# Altium PCB 雾霾检测器PCB.PcbDoc
Units mm, origin at the board's own origin, x right, y up, seen from the top; angles counter-clockwise.
Board outline 99.95 x 68.33 mm, 2 copper layers (Top Layer, Bottom Layer); 13 components, 23 nets, 115 pads, 23 vias.
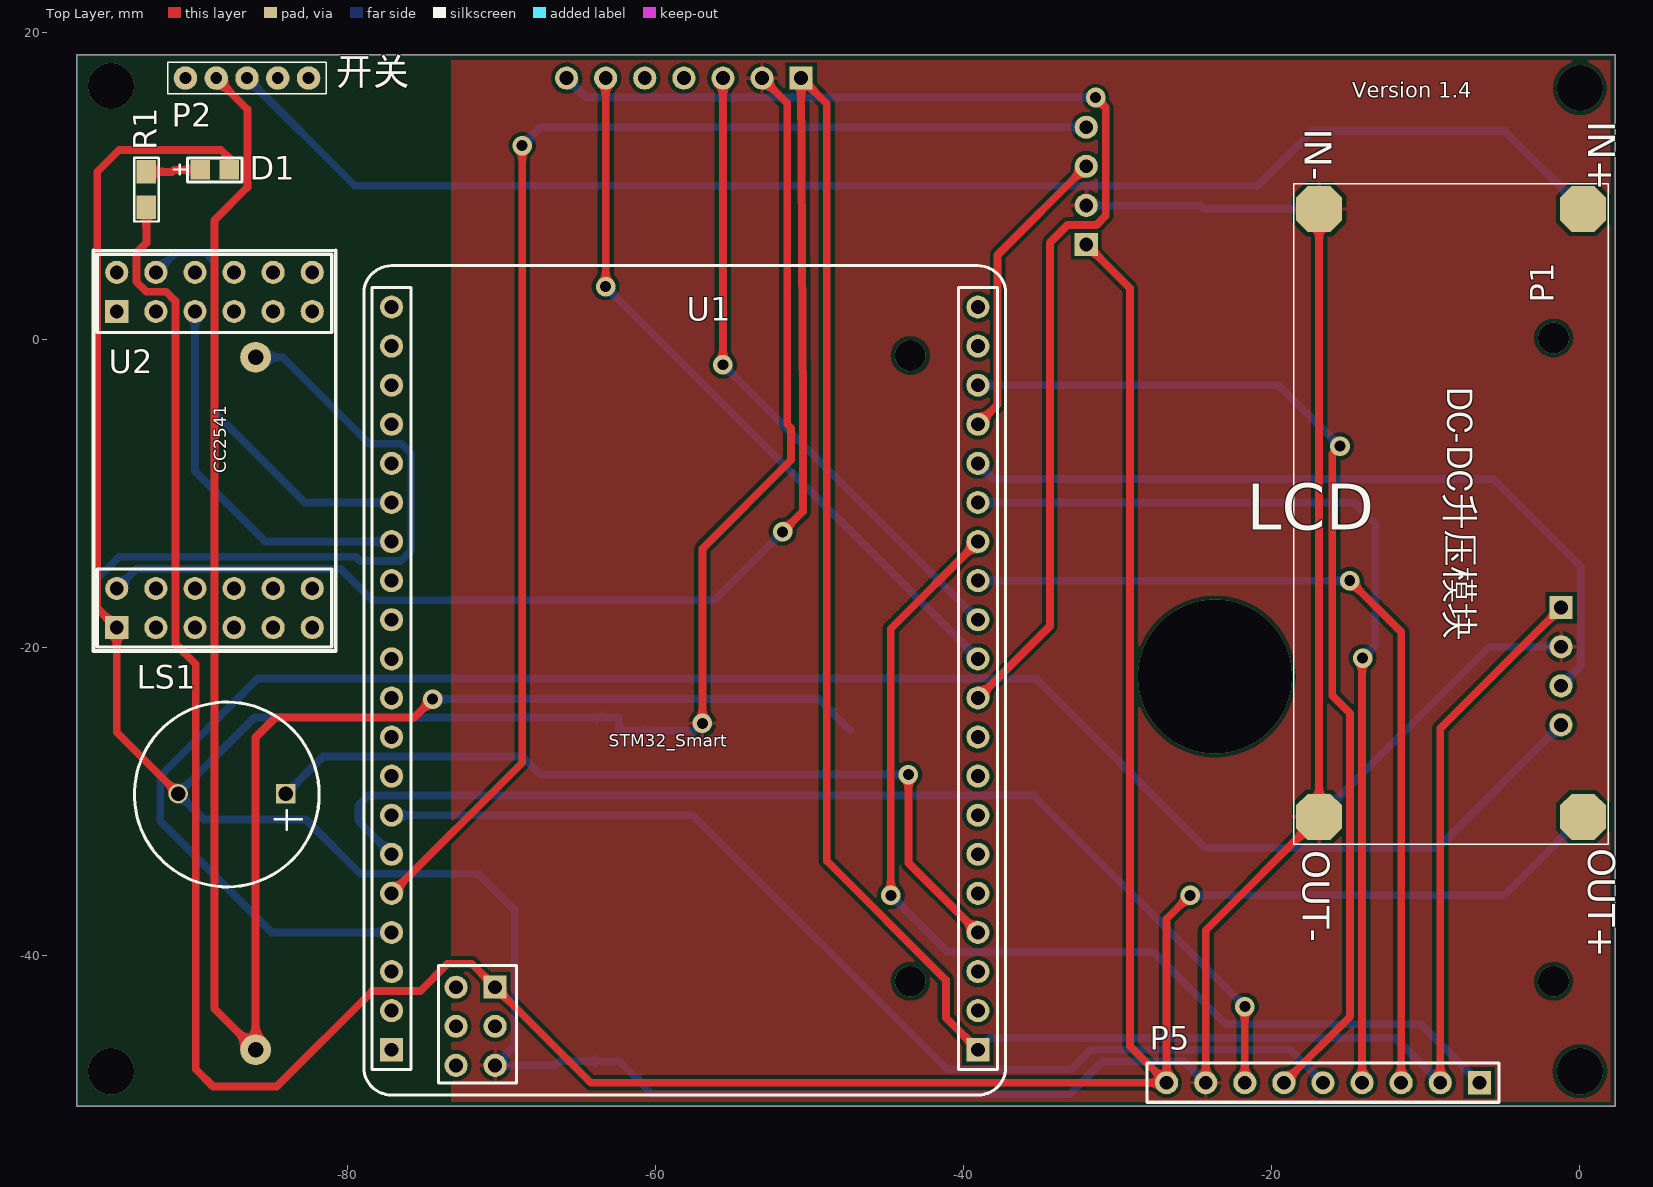
[diagram p0: Top Layer view]
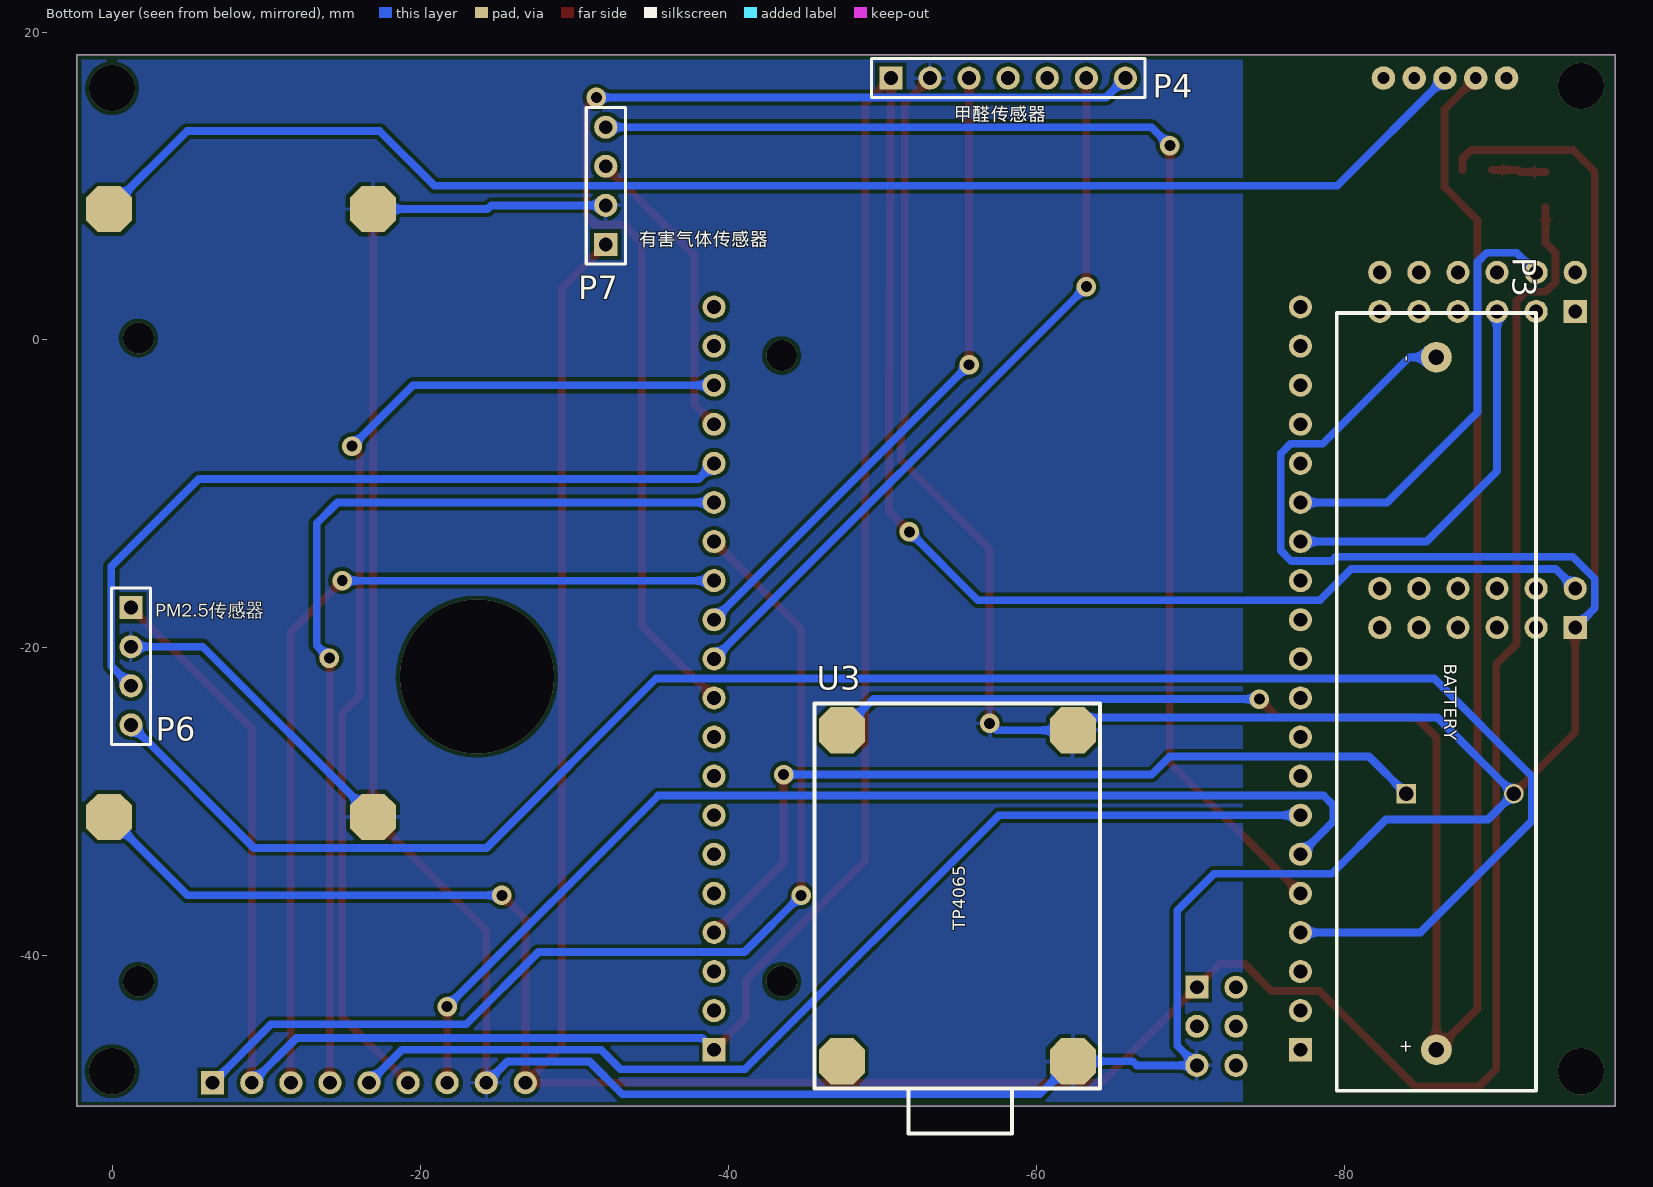
[diagram p1: Bottom Layer view, seen from below]

## Layer stack, top to bottom
Top Solder: solder mask 0.0102, Solder Resist, Dk 3.5
Top Layer: signal copper 0.0356
Dielectric 1: dielectric 0.32, FR-4, Dk 4.8
Bottom Layer: signal copper 0.0356
Bottom Solder: solder mask 0.0102, Solder Resist, Dk 3.5

## Board outline
-97.605,18.525 2.344,18.525 2.344,-49.801 -97.605,-49.801

## Design rules (kind name [scope] priority, off if disabled: settings)
Clearance [All] p1: gap=0.254
PolygonConnect [All] p1: connectstyle=Relief reliefconductorwidth=0.254 reliefentries=4 polygonreliefangle="90 Angle" airgapwidth=0.254
RoutingVias [All] p1: holewidth=0.711 width=1.27 viastyle="Through Hole" minholewidth=0.711 minwidth=1.27 maxholewidth=0.711 maxwidth=1.27
SolderMaskExpansion [All] p1: expansion=0.102
Width [All] p1: maxlimit=1.27 minlimit=0.254 preferedwidth=0.508 minimp=50.000000 maximp=50.000000 favimp=50.000000
30 further rules are at their usual default settings.

## Components (designator, comment, footprint, x,y, rotation, side; value= is the part's Value field where it differs from the comment)
D1 "LED0" 0805-led -88.646,11.049 r0 top
LS1 "Bell" BUZZER-12MM -87.774,-29.481 r180 top
P1 "升压模块" DC-DC升压模块 0.254,8.509 r270 top
P2 "电源开关" 拨动开关（2mm） -90.551,17.018 r0 top
P3 "电池座" 7号电池盒-4.5CM -85.996,-45.229 r90 bottom
P4 "DS-HCHO" HDR1X7 -50.546,17.018 r180 bottom
P5 "LCD" HDR1X9 -6.477,-48.26 r180 top
P6 "雾霾传感器接口" HDR1X4 -1.168,-17.39 r270 bottom
P7 "MQ5" HDR1X4 -32.021,6.206 r90 bottom
R1 "1K" 0805-SMALL -93.091,10.922 r270 top
U1 "STM32" STM32_Smart -77.158,-46.118 r270 top
U2 "CC2541" Smart_RF_2541 -95.013,-18.686 r90 top
U3 "TP4065" TP4065_模块 -47.371,-46.863 r90 bottom

## Footprints (in the part's own frame and the unit in brackets; to place one, negate y for a bottom-side part, rotate by r counter-clockwise, add the part's x,y. Pads: shape width x height; smd on the part's side, far side on the other; paste and mask are expansions set on the pad)
7号电池盒-4.5CM [mm]
  round 2 hole 1: 1(-0.889,0) 2(44.111,0)
  silkscreen extent -3.56,-6.48 46.99,6.48
0805-led [mil]
  rect 50x50 smd: 1(-37.5,0) 2(37.5,0)
  silkscreen extent -105,-31 69,31
0805-SMALL [mil]
  rect 60x50 smd: 1(0,0) 2(90,0)
  silkscreen extent -36,-31 127,32
BUZZER-12MM [mm]
  rect 1.27x1.27 hole 0.95: 1(-3.75,0)
  round 1.27 hole 0.95: 2(3.25,0)
  silkscreen extent -5.91,-5.95 6.09,6.05
DC-DC升压模块 [mm]
  oct 3x3 all layers, no hole: 1(0,0) 2(0,-17.145) 3(39.497,0) 4(39.497,-17.145)
  silkscreen extent -1.65,-18.8 41.27,1.65
HDR1X4 [mm] "Connector; Header; 4 Position"
  rect 1.5x1.5 hole 0.9: 1(0,0)
  round 1.5 hole 0.9: 2(2.54,0) 3(5.08,0) 4(7.62,0)
  silkscreen extent -1.27,-1.27 8.89,1.27
HDR1X7 [mm] "Connector; Header; 7 Position"
  rect 1.5x1.5 hole 0.9: 1(0,0)
  round 1.5 hole 0.9: 2(2.54,0) 3(5.08,0) 4(7.62,0) 5(10.16,0) 6(12.7,0) 7(15.24,0)
  silkscreen extent -1.27,-1.27 16.51,1.27
HDR1X9 [mm] "Connector; Header; 9 Position"
  rect 1.5x1.5 hole 0.9: 1(0,0)
  round 1.5 hole 0.9: 2(2.54,0) 3(5.08,0) 4(7.62,0) 5(10.16,0) 6(12.7,0) 7(15.24,0) 8(17.78,0) 9(20.32,0)
  silkscreen extent -1.27,-1.27 21.59,1.27
Smart_RF_2541 [mm]
  rect 1.5x1.5 hole 0.9: 1(0,0) 13(20.54,0)
  round 1.5 hole 0.9: 2(0,-2.54) 3(0,-5.08) 4(0,-7.62) 5(0,-10.16) 6(0,-12.7) 7(2.54,-12.7) 8(2.54,-10.16) 9(2.54,-7.62) 10(2.54,-5.08) 11(2.54,-2.54) 12(2.54,0) 14(20.54,-2.54) 15(20.54,-5.08) 16(20.54,-7.62) 17(20.54,-10.16) 18(20.54,-12.7) 19(23.08,-12.7) 20(23.08,-10.16) 21(23.08,-7.62) 22(23.08,-5.08) 23(23.08,-2.54) 24(23.08,0)
  silkscreen extent -1.52,-14.22 24.51,1.52
STM32_Smart [mm]
  rect 1.5x1.5 hole 0.9: 1(0,38.1) 40(0,0) 46(-4.064,6.731)
  round 1.5 hole 0.9: 2(-2.54,38.1) 3(-5.08,38.1) 4(-7.62,38.1) 5(-10.16,38.1) 6(-12.7,38.1) 7(-15.24,38.1) 8(-17.78,38.1) 9(-20.32,38.1) 10(-22.86,38.1) 11(-25.4,38.1) 12(-27.94,38.1) 13(-30.48,38.1) 14(-33.02,38.1) 15(-35.56,38.1) 16(-38.1,38.1) 17(-40.64,38.1) 18(-43.18,38.1) 19(-45.72,38.1) 20(-48.26,38.1) 21(-48.26,0) 22(-45.72,0) 23(-43.18,0) 24(-40.64,0) 25(-38.1,0) 26(-35.56,0) 27(-33.02,0) 28(-30.48,0) 29(-27.94,0) 30(-25.4,0) 31(-22.86,0) 32(-20.32,0) 33(-17.78,0) 34(-15.24,0) 35(-12.7,0) 36(-10.16,0) 37(-7.62,0) 38(-5.08,0) 39(-2.54,0) 41(-4.064,4.191) 42(-1.524,4.191) 43(1.016,4.191) 44(1.016,6.731) 45(-1.524,6.731)
  silkscreen extent -50.95,-1.8 2.94,39.9
TP4065_模块 [mm]
  oct 3x3 / inner oct 3x3 / far side oct 0x0 all layers, no hole: 1(0,0) 2(0,-15) 3(21.5,-15) 4(21.5,0)
  silkscreen extent -4.7,-16.76 23.24,1.78
拨动开关（2mm） [mil]
  round 60 hole 30: 0(0,0) 0(314.96,0) 1(78.74,0) 2(157.48,0) 3(236.22,0)
  silkscreen extent -45,-40 360,40

## Part data
D1: "Typical INFRARED GaAs LED"
LS1: "Electrical Bell"
P1 P6 P7: library part "Header 4", "Header, 4-Pin"
P2: library part "Header 3", "Header, 3-Pin"
P3: library part "Header 2", "Header, 2-Pin"
P4: library part "Header 7", "Header, 7-Pin"
P5: library part "Header 9", "Header, 9-Pin"
R1: library part RES2
U1: library part STM32_Smart
U2: library part Smart_RF_2541
U3: library part "TP4056_ 模块"

## Via types
v1: diameter 1.27, hole 0.711, Top Layer to Bottom Layer, 14 vias
v2: diameter 2, hole 2, Top Layer to Bottom Layer, 4 vias
v3: diameter 3, hole 3, Top Layer to Bottom Layer, 4 vias
v4: diameter 10, hole 10, Top Layer to Bottom Layer, 1 vias

## Nets (pads, with @x,y where several pads share a name; then routed paths per layer and width w, separated by ;. In a path a pad name is that pad's centre, name@x,y a point inside that pad or via, vN(x,y) a via of type N, cw(c..) or ccw(c..) an arc to the next point about the centre after c; other vN are vias at no path point)
ADC1: P6.3 U1.16 | length 50.2
  Bottom Layer w0.508: U1.16 -38.043,-9.033 -5.576,-9.033 0.114,-14.723 0.114,-21.188 P6.3
ADC2: P7.3 U1.17 | length 19.7
  Top Layer w0.508: U1.17 -37.783,-4.203 -37.783,5.524 P7.3
CS: P5.7 U1.35 | length 72.6
  Top Layer w0.508: P5.7 v1(-21.717,-43.311)
  Bottom Layer w0.508: U1.35 -79.312,-31.264 -79.312,-30.242 -78.677,-29.607 -35.421,-29.607 v1(-21.717,-43.311)
D/C: P5.5 U1.34 | length 68.8
  Bottom Layer w0.508: U1.34 -57.569,-30.878 -41.06,-47.387 -32.984,-47.387 -31.714,-46.117 -18.78,-46.117 P5.5
DS-RX: P4.7 U1.10 | length 78.7
  Top Layer w0.508: U1.10 -34.38,-18.58 -34.38,6.334 -33.237,7.477 -31.357,7.477 -30.747,8.087 -30.747,15.097 v1(-31.408,15.757)
  Bottom Layer w0.508: P4.7 -64.525,15.757 v1(-31.408,15.757)
DS-TX: P4.6 U1.11 | length 47.8
  Top Layer w0.508: v1(-63.246,3.47) P4.6
  Bottom Layer w0.508: v1(-63.246,3.47) U1.11
GND: D1.2 LS1.2 P1.2 P1.4 P3.2 P4.2 P5.8 P6.2 P7.2 U1.44 U2.1 U3.2 U3.3 | length 358.7
  Top Layer w0.508: LS1.2 -95.013,-25.492 U2.1 -96.279,-17.42 -96.279,10.931 -94.857,12.354 -88.253,12.354 -87.694,11.794 D1.2 ; v1(-56.96,-24.908) -56.96,-13.554 -51.194,-7.788 -51.194,-5.731 -51.448,-5.477 -51.448,15.38 P4.2 ; P5.8 -24.257,-38.354 P1.4 P1.2
  Bottom Layer w0.508: U2.1 -96.279,-17.42 -96.279,-15.51 -94.857,-14.088 -79.465,-14.088 -79.185,-14.367 -76.569,-14.367 -75.883,-13.681 -75.883,-7.382 -76.518,-6.747 -78.601,-6.747 -84.23,-1.118 P3.2 ; v1(-56.96,-24.908) -57.415,-25.363 U3.3 -62.371,-24.527 -86.07,-24.527 LS1.2 -89.349,-31.156 -82.716,-31.156 -79.185,-34.687 -71.54,-34.687 -69.152,-37.075 -69.152,-45.859 U1.44 -66.536,-47.134 -66.265,-46.863 U3.2 -60.221,-49.013 -33.098,-49.013 -30.964,-46.879 -25.638,-46.879 P5.8 ; P7.2 -24.575,8.746 -24.338,8.509 P1.2 ; P1.4 -5.833,-19.93 P6.2
MISO: P5.1 U1.14 | length 68.6
  Top Layer w0.508: v1(-44.717,-36.084) -44.717,-18.757 U1.14
  Bottom Layer w0.508: v1(-44.717,-36.084) -41.034,-39.767 -27.649,-39.767 -22.95,-44.466 -10.271,-44.466 P5.1
MOSI: P5.4 U1.15 | length 63.1
  Top Layer w0.508: P5.4 -14.097,-20.704 v1(-14.06,-20.666)
  Bottom Layer w0.508: U1.15 -14.593,-10.558 -13.247,-11.904 -13.247,-19.853 v1(-14.06,-20.666)
NetD1_1: D1.1 R1.1 | length 3.5
  Top Layer w0.508: R1.1 -91.428,10.922 -91.301,11.049 D1.1
PB5: U1.33
PB8: P7.4 U1.36 | length 89.2
  Top Layer w0.508: U1.36 -68.67,-27.47 v1(-68.67,12.633)
  Bottom Layer w0.508: v1(-68.67,12.633) -67.477,13.826 P7.4
PB9: P6.4 U1.37 | length 122.5
  Bottom Layer w0.508: U1.37 -84.95,-38.498 -92.19,-31.258 -92.19,-28.337 -85.84,-21.987 -35.294,-21.987 -24.27,-33.011 -9.169,-33.011 P6.4
PC13: LS1.1 U1.4 | length 54.1
  Top Layer w0.508: v1(-43.574,-28.235) -43.574,-33.982 U1.4
  Bottom Layer w0.508: LS1.1 -81.61,-27.067 -68.67,-27.067 -67.501,-28.235 v1(-43.574,-28.235)
RESET: P4.3 U1.12 | length 42.1
  Top Layer w0.508: v1(-55.626,-1.61) P4.3
  Bottom Layer w0.508: v1(-55.626,-1.61) U1.12
RST: P5.6 U1.18 | length 69
  Top Layer w0.508: P5.6 -14.872,-43.955 -14.872,-24.273 -16.041,-23.105 -16.041,-7.407 v1(-15.533,-6.899)
  Bottom Layer w0.508: U1.18 -19.494,-2.938 v1(-15.533,-6.899)
SCK: P5.3 U1.13 | length 58.2
  Top Layer w0.508: v1(-14.898,-15.638) -11.557,-18.979 P5.3
  Bottom Layer w0.508: U1.13 v1(-14.898,-15.638)
STM32RX-2541TX: U1.27 U2.15 | length 25
  Bottom Layer w0.508: U2.15 -89.933,-8.521 -85.356,-13.098 U1.27
STM32TX-2541RX: U1.26 U2.23 | length 28.3
  Bottom Layer w0.508: U2.23 -91.193,5.674 -89.269,5.674 -88.659,5.064 -88.659,-4.69 -82.791,-10.558 U1.26
VCC3.3: P4.1 P5.2 P6.1 U1.1 U2.12 | length 210.1
  Top Layer w0.508: v1(-51.753,-12.462) -50.432,-11.141 -50.432,-4.74 P4.1 -48.883,15.355 -48.883,-33.845 -41.136,-41.592 -41.136,-44.04 U1.1 ; P5.2 -9.017,-25.239 P6.1
  Bottom Layer w0.508: U2.12 -93.742,-14.875 -80.455,-14.875 -78.423,-16.907 -56.198,-16.907 v1(-51.753,-12.462) ; U1.1 -38.295,-45.355 -11.922,-45.355 P5.2
VCC5: P1.3 P5.9 P7.1 R1.2 U1.46 | length 225.8
  Top Layer w0.508: R1.2 -93.091,6.297 -93.739,5.648 -93.739,3.794 -93.079,3.134 -91.809,3.134 -91.199,2.524 -91.199,-19.752 -89.879,-21.073 -89.879,-47.387 -88.761,-48.505 -84.621,-48.505 -78.423,-42.307 -75.299,-42.307 -73.521,-40.529 -71.952,-40.529 U1.46 -64.221,-48.26 P5.9 ; P7.1 -29.173,3.358 -29.173,-45.884 P5.9 ; v1(-25.273,-36.084) -26.797,-37.608 P5.9
  Bottom Layer w0.508: v1(-25.273,-36.084) -4.842,-36.084 P1.3
VCCBAT: P1.1 P2.2 | length 93.3
  Bottom Layer w0.508: P2.2 -79.55,10.017 -20.892,10.017 -17.336,13.573 -4.81,13.573 P1.1
VCCD: P2.1 P3.1 U3.4 | length 126.8
  Top Layer w0.508: P2.1 -86.526,14.993 -86.526,9.915 -88.659,7.782 -88.659,-43.455 P3.1 -85.996,-25.826 -84.697,-24.527 -75.68,-24.527 v1(-74.486,-23.333)
  Bottom Layer w0.508: v1(-74.486,-23.333) -49.401,-23.333 U3.4
pads on no net: P2.0 P2.3 P4.4 P4.5 U1.2 U1.3 U1.5 U1.6 U1.7 U1.8 U1.9 U1.19 U1.20 U1.21 U1.22 U1.23 U1.24 U1.25 U1.28 U1.29 U1.30 U1.31 U1.32 U1.38 U1.39 U1.40 U1.41 U1.42 U1.43 U1.45 U2.2 U2.3 U2.4 U2.5 U2.6 U2.7 U2.8 U2.9 U2.10 U2.11 U2.13 U2.14 U2.16 U2.17 U2.18 U2.19 U2.20 U2.21 U2.22 U2.24 U3.1
copper on no net:
  other v2: -43.451,-41.673 -1.651,-41.673 -43.451,-1.016 -1.651,0.127
  other v3: -95.394,-47.515 0.058,-47.515 0.058,16.366 -95.394,16.493
  other v4: -23.651,-21.873

## Polygon pours and split planes (outlines as drawn)
GND on Bottom Layer "Top Overlay-No Net" (solid, pour order 4): -73.406,18.415 -73.406,-49.657 2.159,-49.657 2.159,18.288
GND on Top Layer "Top Overlay-No Net" (solid, pour order 6): -73.279,18.161 -73.279,-49.53 2.032,-49.53 2.032,18.161

## Keep-outs
Keep-Out Layer:
  lines w0.1: -97.605,-49.801 -97.605,18.525 2.344,18.525 2.344,-49.801 -2.355,-49.801 -97.605,-49.801

## Silkscreen, mask and mechanical layers (free items; w line width, h text height)
Top Overlay:
  text "开关" at -80.772,16.002 h3
  text "Version 1.4" at -14.749,15.731 h1
  text "LCD" at -21.607,-12.336 h3
Bottom Overlay:
  text "甲醛传感器" at -54.627,13.953 h1.5
  text "有害气体传感器" at -34.18,5.825 h1.5
  text "PM2.5传感器" at -2.794,-18.288 h1.5

## Text inside footprints (layer, text, board x,y; h text height)
P1: Top Overlay "DC-DC升压模块" at -9.144,-3.048 h3 r270; Top Overlay "OUT+" at 0,-33.02 h3 r270; Top Overlay "OUT-" at -18.542,-33.147 h3 r270; Top Overlay "IN-" at -18.415,13.716 h3 r270; Top Overlay "IN+" at 0,14.224 h3 r270
P3: Bottom Overlay "-" at -84.345,-1.414 h0.8 r270; Bottom Overlay "+" at -84.345,-46.372 h0.8 r270; Bottom Overlay "BATTERY" at -86.503,-21.053 h0.8 r90
U1: Top Overlay "STM32_Smart" at -63.061,-26.433 h0.8